# EAGLE board Qwiic GPS - Ublox SAM-M8Q-Panel (EAGLE 9.3.0)
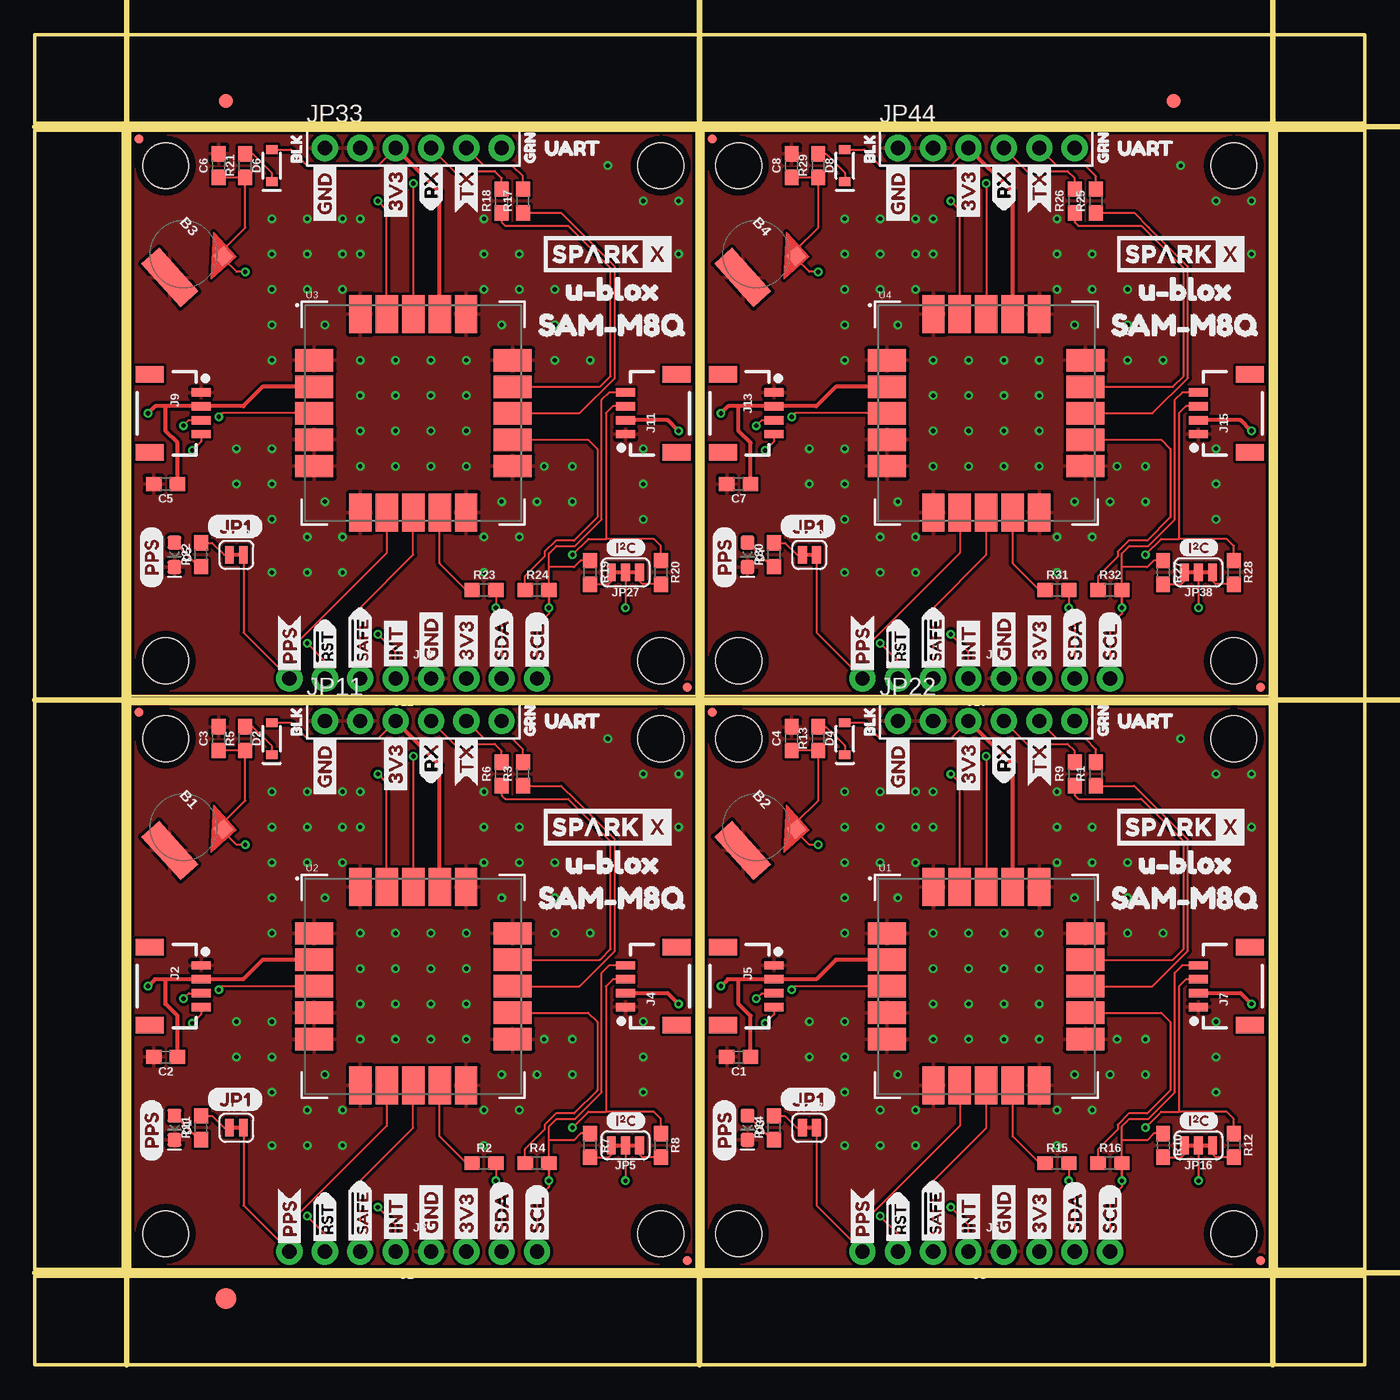
[diagram p0: board, top side]
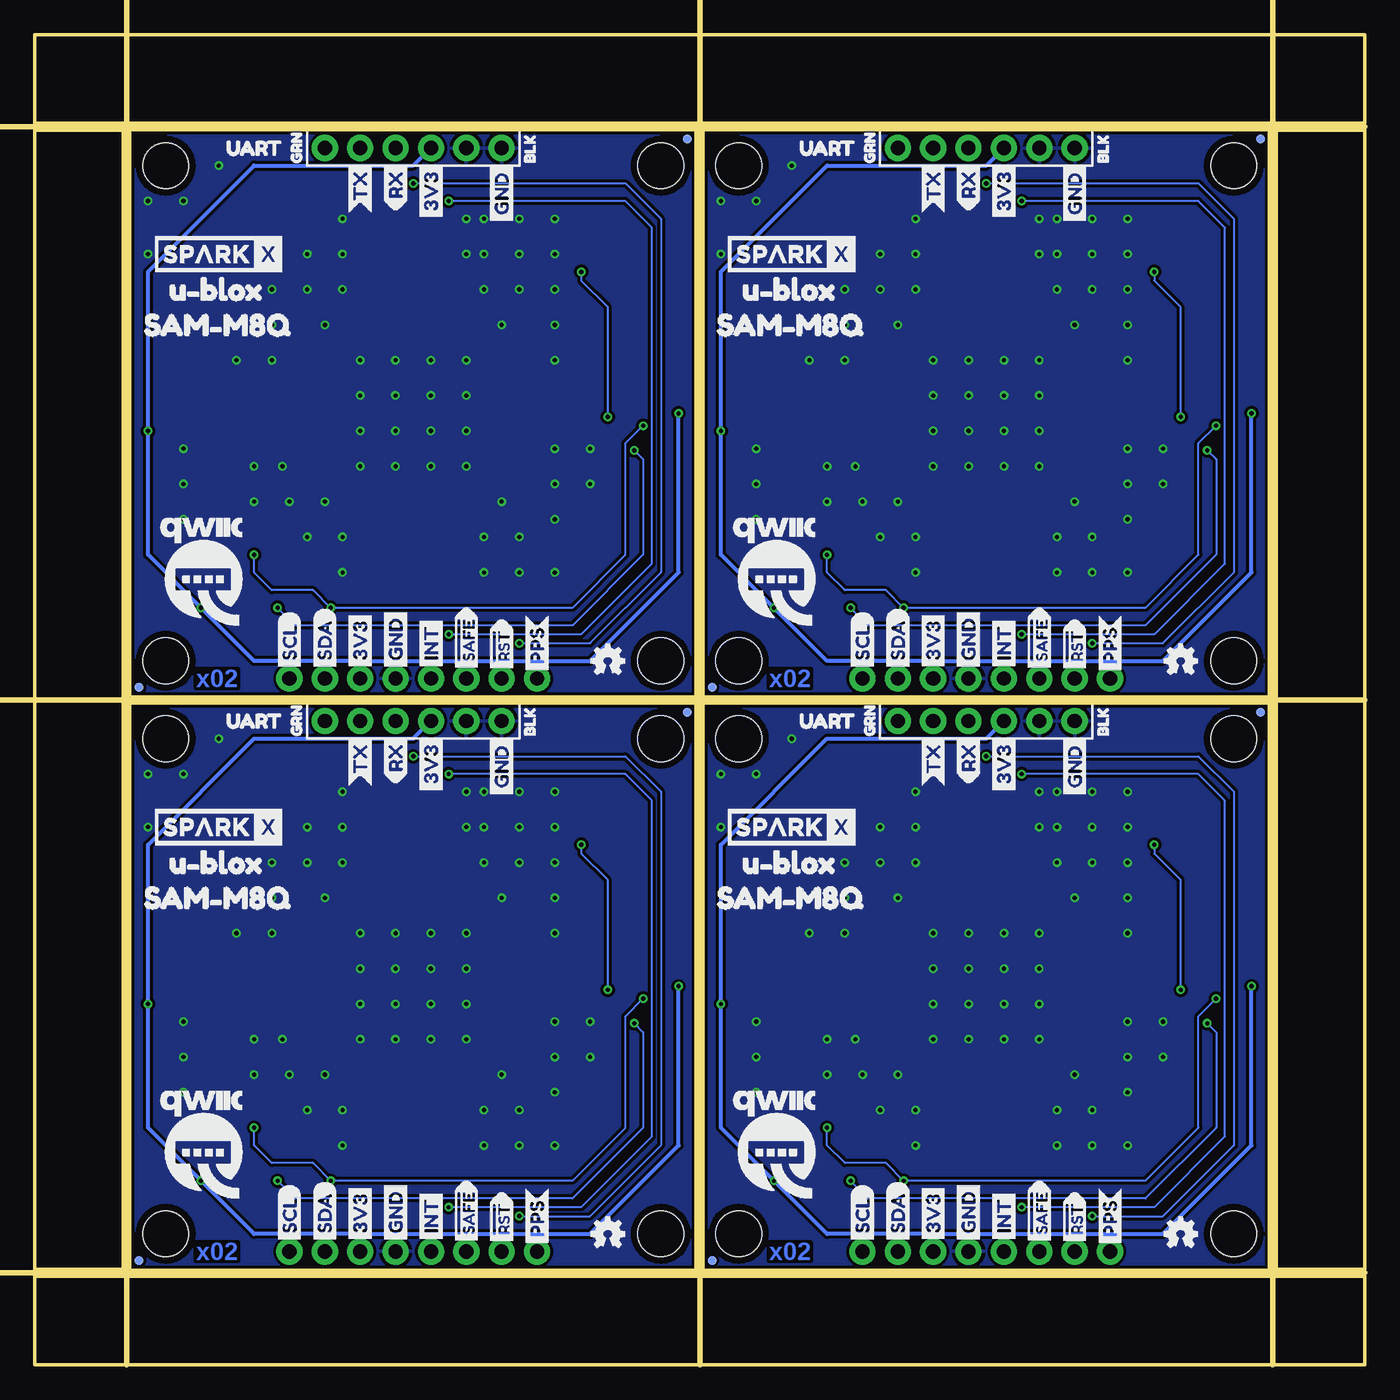
[diagram p1: board, bottom side, seen from below]

Size 95.5 x 95.5 mm. Coordinates in mm from the lower left corner, seen from the top.
Outline: 6.86,6.86 6.86,47.5 47.5,47.5 47.5,6.86 6.86,6.86
Outline: 48.01,6.86 48.01,47.5 88.65,47.5 88.65,6.86 48.01,6.86
Outline: 6.86,48.01 6.86,88.65 47.5,88.65 47.5,48.01 6.86,48.01
Outline: 48.01,48.01 48.01,88.65 88.65,88.65 88.65,48.01 48.01,48.01
Outline: 0,6.35 95.5,6.35 95.5,0 0,0 0,6.35
Outline: 89.15,88.65 95.5,88.65 95.5,6.86 89.15,6.86 89.15,88.65
Outline: 0,95.5 95.5,95.5 95.5,89.15 0,89.15 0,95.5
Outline: 0,88.65 6.35,88.65 6.35,6.86 0,6.86 0,88.65
Copper layers (1*16): Top 0.035mm / dielectric 1.5mm / Bottom 0.035mm
Design rules "SparkFun-2-layer-PCBWay-LIMIT": minimum track width 6mil, minimum drill 0.3mm, track to track 6mil, track to pad 6mil, pad to pad 6mil, via to via 6mil, smd to smd 6mil, copper to edge 6mil, drill to drill 6mil, minimum pad ring 6mil, minimum via ring 6mil, stop-mask expansion 4mil, vias tented up to drill 25mil, thermal gap 10mil
Milling: 6 lines

## Footprints (pad centres in the part's own frame; a part is rotated, then mirrored left to right if it is on the bottom)
ML414H_IV01E = smd 1 x 1: + 2.022,2.032 | smd 4.2 x 1.7: - 0.6,-1.85
0603 = smd 1.1 x 1: 1 -0.85,0; 2 0.85,0
LED-0603 = smd 1 x 1: A -0.877,0; C 0.877,0
SOD-323 = smd 0.63 x 0.83: A 1.15,0; C -1.15,0
FIDUCIAL-1X2 = smd 1 x 1: 1 0,0
FIDUCIAL-1.5X3 = smd 1.5 x 1.5: 1 0,0
1X04_NO_SILK = drill 1.016 pad 1.88: 1 0,0; 2 2.54,0; 3 5.08,0; 4 7.62,0
1X04_1MM_RA = smd 0.6 x 1.35: 1 -1.5,0; 2 -0.5,0; 3 0.5,0; 4 1.5,0 | smd 1.2 x 2: NC1 2.8,-3.675; NC2 -2.8,-3.675
SMT-JUMPER_2_NC_TRACE_SILK = smd 0.635 x 1.27: 1 -0.508,0; 2 0.508,0
MICRO-FIDUCIAL = smd 0.635 x 0.635: 1 0,0
STAND-OFF = hole 3.302: 0,0
SMT-JUMPER_3_2-NC_TRACE_SILK = smd 0.635 x 1.27: 1 -1.016,0; 2 0,0; 3 1.016,0
1X06_NO_SILK = drill 1.016 pad 1.88: 1 0,0; 2 2.54,0; 3 5.08,0; 4 7.62,0; 5 10.16,0; 6 12.7,0
SAM-M8Q = smd 2.75 x 1.6: 1 -7.125,3.8; 2 -7.125,1.9; 3 -7.125,0; 4 -7.125,-1.9; 5 -7.125,-3.8; 11 7.125,-3.8; 12 7.125,-1.9; 13 7.125,0; 14 7.125,1.9; 15 7.125,3.8 | smd 1.6 x 2.75: 6 -3.8,-7.125; 7 -1.9,-7.125; 8 0,-7.125; 9 1.9,-7.125; 10 3.8,-7.125; 16 3.8,7.125; 17 1.9,7.125; 18 0,7.125; 19 -1.9,7.125; 20 -3.8,7.125

## Placement (x,y rotation side)
B1  6.8MM_COIN_CELL  [ML414H_IV01E]  10.67,38.61 312 top
B2  6.8MM_COIN_CELL  [ML414H_IV01E]  51.82,38.61 312 top
B3  6.8MM_COIN_CELL  [ML414H_IV01E]  10.67,79.76 312 top
B4  6.8MM_COIN_CELL  [ML414H_IV01E]  51.82,79.76 312 top
C1  1.0uF  [0603]  50.55,22.1 180 top
C2  1.0uF  [0603]  9.4,22.1 180 top
C3  1.0uF  [0603]  13.21,44.96 90 top
C4  1.0uF  [0603]  54.36,44.96 90 top
C5  1.0uF  [0603]  9.4,63.25 180 top
C6  1.0uF  [0603]  13.21,86.11 90 top
C7  1.0uF  [0603]  50.55,63.25 180 top
C8  1.0uF  [0603]  54.36,86.11 90 top
D1  Yellow  [LED-0603]  10.03,17.02 270 top
D2  0.5A/40V/420mV  [SOD-323]  17.02,44.96 90 top
D3  Yellow  [LED-0603]  51.18,17.02 270 top
D4  0.5A/40V/420mV  [SOD-323]  58.17,44.96 90 top
D5  Yellow  [LED-0603]  10.03,58.17 270 top
D6  0.5A/40V/420mV  [SOD-323]  17.02,86.11 90 top
D7  Yellow  [LED-0603]  51.18,58.17 270 top
D8  0.5A/40V/420mV  [SOD-323]  58.17,86.11 90 top
E$1  [FIDUCIAL-1X2]  13.72,90.74 0 top
E$2  [FIDUCIAL-1X2]  81.79,90.74 0 top
E$3  [FIDUCIAL-1.5X3]  13.72,4.76 0 top
J1  [1X04_NO_SILK]  25.91,8.13 180 top
J2  [1X04_1MM_RA]  11.94,27.18 270 top
J3  PTH  [1X04_NO_SILK]  28.45,8.13 0 top
J4  [1X04_1MM_RA]  42.42,27.18 90 top
J5  [1X04_1MM_RA]  53.09,27.18 270 top
J6  PTH  [1X04_NO_SILK]  69.6,8.13 0 top
J7  [1X04_1MM_RA]  83.57,27.18 90 top
J8  [1X04_NO_SILK]  67.06,8.13 180 top
J9  [1X04_1MM_RA]  11.94,68.33 270 top
J10  PTH  [1X04_NO_SILK]  28.45,49.28 0 top
J11  [1X04_1MM_RA]  42.42,68.33 90 top
J12  [1X04_NO_SILK]  25.91,49.28 180 top
J13  [1X04_1MM_RA]  53.09,68.33 270 top
J14  PTH  [1X04_NO_SILK]  69.6,49.28 0 top
J15  [1X04_1MM_RA]  83.57,68.33 90 top
J16  [1X04_NO_SILK]  67.06,49.28 180 top
JP1  [SMT-JUMPER_2_NC_TRACE_SILK]  14.48,17.02 0 top
JP2  FIDUCIALUFIDUCIAL  [MICRO-FIDUCIAL]  46.86,7.49 0 top
JP3  STAND-OFF  [STAND-OFF]  9.4,44.96 0 top
JP4  STAND-OFF  [STAND-OFF]  44.96,44.96 0 top
JP5  [SMT-JUMPER_3_2-NC_TRACE_SILK]  42.42,15.75 180 top
JP6  FIDUCIALUFIDUCIAL  [MICRO-FIDUCIAL]  7.49,46.86 0 top
JP7  FIDUCIALUFIDUCIAL  [MICRO-FIDUCIAL]  46.86,7.49 0 bottom
JP8  FIDUCIALUFIDUCIAL  [MICRO-FIDUCIAL]  7.49,46.86 0 bottom
JP9  STAND-OFF  [STAND-OFF]  9.4,9.4 0 top
JP10  STAND-OFF  [STAND-OFF]  44.96,9.4 0 top
JP11  BOOT  [1X06_NO_SILK]  20.83,46.23 0 top
JP12  STAND-OFF  [STAND-OFF]  50.55,44.96 0 top
JP13  STAND-OFF  [STAND-OFF]  86.11,44.96 0 top
JP14  FIDUCIALUFIDUCIAL  [MICRO-FIDUCIAL]  88.01,7.49 0 top
JP15  FIDUCIALUFIDUCIAL  [MICRO-FIDUCIAL]  48.64,46.86 0 top
JP16  [SMT-JUMPER_3_2-NC_TRACE_SILK]  83.57,15.75 180 top
JP17  [SMT-JUMPER_2_NC_TRACE_SILK]  55.63,17.02 0 top
JP18  FIDUCIALUFIDUCIAL  [MICRO-FIDUCIAL]  88.01,7.49 0 bottom
JP19  FIDUCIALUFIDUCIAL  [MICRO-FIDUCIAL]  48.64,46.86 0 bottom
JP20  STAND-OFF  [STAND-OFF]  50.55,9.4 0 top
JP21  STAND-OFF  [STAND-OFF]  86.11,9.4 0 top
JP22  BOOT  [1X06_NO_SILK]  61.98,46.23 0 top
JP23  STAND-OFF  [STAND-OFF]  9.4,86.11 0 top
JP24  STAND-OFF  [STAND-OFF]  44.96,86.11 0 top
JP25  FIDUCIALUFIDUCIAL  [MICRO-FIDUCIAL]  46.86,48.64 0 top
JP26  FIDUCIALUFIDUCIAL  [MICRO-FIDUCIAL]  7.49,88.01 0 top
JP27  [SMT-JUMPER_3_2-NC_TRACE_SILK]  42.42,56.9 180 top
JP28  [SMT-JUMPER_2_NC_TRACE_SILK]  14.48,58.17 0 top
JP29  FIDUCIALUFIDUCIAL  [MICRO-FIDUCIAL]  46.86,48.64 0 bottom
JP30  FIDUCIALUFIDUCIAL  [MICRO-FIDUCIAL]  7.49,88.01 0 bottom
JP31  STAND-OFF  [STAND-OFF]  9.4,50.55 0 top
JP32  STAND-OFF  [STAND-OFF]  44.96,50.55 0 top
JP33  BOOT  [1X06_NO_SILK]  20.83,87.38 0 top
JP34  STAND-OFF  [STAND-OFF]  50.55,86.11 0 top
JP35  STAND-OFF  [STAND-OFF]  86.11,86.11 0 top
JP36  FIDUCIALUFIDUCIAL  [MICRO-FIDUCIAL]  88.01,48.64 0 top
JP37  FIDUCIALUFIDUCIAL  [MICRO-FIDUCIAL]  48.64,88.01 0 top
JP38  [SMT-JUMPER_3_2-NC_TRACE_SILK]  83.57,56.9 180 top
JP39  [SMT-JUMPER_2_NC_TRACE_SILK]  55.63,58.17 0 top
JP40  FIDUCIALUFIDUCIAL  [MICRO-FIDUCIAL]  88.01,48.64 0 bottom
JP41  FIDUCIALUFIDUCIAL  [MICRO-FIDUCIAL]  48.64,88.01 0 bottom
JP42  STAND-OFF  [STAND-OFF]  50.55,50.55 0 top
JP43  STAND-OFF  [STAND-OFF]  86.11,50.55 0 top
JP44  BOOT  [1X06_NO_SILK]  61.98,87.38 0 top
LOGO1  OSHW-LOGOMINI  [OSHW-LOGO-MINI]  13.21,9.4 0 bottom
LOGO2  OSHW-LOGOMINI  [OSHW-LOGO-MINI]  54.36,9.4 0 bottom
LOGO3  OSHW-LOGOMINI  [OSHW-LOGO-MINI]  13.21,50.55 0 bottom
LOGO4  OSHW-LOGOMINI  [OSHW-LOGO-MINI]  54.36,50.55 0 bottom
R1  470  [0603]  76.2,42.42 90 top
R2  22  [0603]  32.26,14.48 0 top
R3  470  [0603]  35.05,42.42 90 top
R4  22  [0603]  36.07,14.48 0 top
R5  1k  [0603]  15.11,44.96 90 top
R6  470  [0603]  33.53,42.42 90 top
R7  2.2k  [0603]  39.88,15.75 270 top
R8  2.2k  [0603]  44.96,15.75 270 top
R9  470  [0603]  74.68,42.42 90 top
R10  2.2k  [0603]  81.03,15.75 270 top
R11  1k  [0603]  11.94,17.02 90 top
R12  2.2k  [0603]  86.11,15.75 270 top
R13  1k  [0603]  56.26,44.96 90 top
R14  1k  [0603]  53.09,17.02 90 top
R15  22  [0603]  73.41,14.48 0 top
R16  22  [0603]  77.22,14.48 0 top
R17  470  [0603]  35.05,83.57 90 top
R18  470  [0603]  33.53,83.57 90 top
R19  2.2k  [0603]  39.88,56.9 270 top
R20  2.2k  [0603]  44.96,56.9 270 top
R21  1k  [0603]  15.11,86.11 90 top
R22  1k  [0603]  11.94,58.17 90 top
R23  22  [0603]  32.26,55.63 0 top
R24  22  [0603]  36.07,55.63 0 top
R25  470  [0603]  76.2,83.57 90 top
R26  470  [0603]  74.68,83.57 90 top
R27  2.2k  [0603]  81.03,56.9 270 top
R28  2.2k  [0603]  86.11,56.9 270 top
R29  1k  [0603]  56.26,86.11 90 top
R30  1k  [0603]  53.09,58.17 90 top
R31  22  [0603]  73.41,55.63 0 top
R32  22  [0603]  77.22,55.63 0 top
U1  SAM-M8Q  [SAM-M8Q]  68.33,27.18 0 top
U2  SAM-M8Q  [SAM-M8Q]  27.18,27.18 0 top
U3  SAM-M8Q  [SAM-M8Q]  27.18,68.33 0 top
U4  SAM-M8Q  [SAM-M8Q]  68.33,68.33 0 top
U$1  [SDA-[)]  33.53,8.51 90 top
U$2  SPARKX-LOGO4  [SPARKX-MEDIUM]  41.15,38.61 0 bottom
U$3  [SCL-[)]  36.07,8.51 90 top
U$4  [SDA-[)]  33.53,8.51 90 bottom
U$5  [SCL-[)]  36.07,8.51 90 bottom
U$6  [3V3-04]  30.99,8.51 90 top
U$7  [3V3-04]  30.99,8.51 90 bottom
U$8  [GND-04]  28.45,8.51 90 top
U$9  [GND-04]  28.45,8.51 90 bottom
U$10  [I_SUPER2_C-()-03]  41.02,17.53 0 top
U$11  [UART0]  41.53,46.23 0 bottom
U$12  [BLK1]  18.8,44.45 90 top
U$13  [BLK1]  18.8,44.45 90 bottom
U$14  [GRN2]  35.56,44.45 90 top
U$15  [INT8]  25.91,8.51 90 top
U$16  [INT8]  25.91,8.51 90 bottom
U$17  [GRN2]  35.56,44.45 90 bottom
U$18  [JP10]  12.32,19.05 0 top
U$19  [RX6]  28.45,41.66 90 top
U$20  [RX6]  28.45,41.66 90 bottom
U$21  [SAM#M8Q4]  34.8,33.53 0 top
U$22  [U#BLOX3]  46.1,36.07 0 bottom
U$23  [TX7]  30.99,41.53 90 top
U$24  [TX7]  30.99,41.53 90 bottom
U$25  [SAM#M8Q4]  47.88,33.53 0 bottom
U$26  [U#BLOX3]  36.7,36.07 0 top
U$27  [3V3-04]  25.91,40.77 90 top
U$28  [QWIIC-LOGO-LARGE]  42.42,15.75 0 bottom
U$29  [PPS0]  8.38,14.61 90 top
U$30  [SDA-[)]  74.68,8.51 90 top
U$31  SPARKX-LOGO4  [SPARKX-MEDIUM]  41.15,38.61 0 top
U$32  [3V3-04]  25.91,40.77 90 bottom
U$33  [GND-04]  20.83,40.51 90 top
U$34  [GND-04]  20.83,40.51 90 bottom
U$35  [#RST3]  20.83,8.25 90 top
U$36  [#RST3]  20.83,8.25 90 bottom
U$37  [SCL-[)]  77.22,8.51 90 top
U$38  [SDA-[)]  74.68,8.51 90 bottom
U$39  [#SAFE1]  23.37,8.25 90 top
U$40  [#SAFE1]  23.37,8.25 90 bottom
U$41  [SCL-[)]  77.22,8.51 90 bottom
U$42  [3V3-04]  72.14,8.51 90 top
U$43  [PPS5]  18.29,8.25 90 top
U$44  [PPS5]  18.29,8.25 90 bottom
U$45  [UART0]  35.69,46.23 0 top
U$46  [3V3-04]  72.14,8.51 90 bottom
U$47  [GND-04]  69.6,8.51 90 top
U$48  [GND-04]  69.6,8.51 90 bottom
U$49  [I_SUPER2_C-()-03]  82.17,17.53 0 top
U$50  [INT8]  67.06,8.51 90 top
U$51  [INT8]  67.06,8.51 90 bottom
U$52  [RX6]  69.6,41.66 90 top
U$53  [RX6]  69.6,41.66 90 bottom
U$54  [SAM#M8Q4]  75.95,33.53 0 top
U$55  [TX7]  72.14,41.53 90 top
U$56  [TX7]  72.14,41.53 90 bottom
U$57  [U#BLOX3]  77.85,36.07 0 top
U$58  [U#BLOX3]  87.25,36.07 0 bottom
U$59  [SAM#M8Q4]  89.03,33.53 0 bottom
U$60  [PPS0]  49.53,14.61 90 top
U$61  SPARKX-LOGO4  [SPARKX-MEDIUM]  82.3,38.61 0 top
U$62  SPARKX-LOGO4  [SPARKX-MEDIUM]  82.3,38.61 0 bottom
U$63  [3V3-04]  67.06,40.77 90 top
U$64  [3V3-04]  67.06,40.77 90 bottom
U$65  [GND-04]  61.98,40.51 90 top
U$66  [GND-04]  61.98,40.51 90 bottom
U$67  [#RST3]  61.98,8.25 90 top
U$68  [#RST3]  61.98,8.25 90 bottom
U$69  [#SAFE1]  64.52,8.25 90 top
U$70  [#SAFE1]  64.52,8.25 90 bottom
U$71  [PPS5]  59.44,8.25 90 top
U$72  [PPS5]  59.44,8.25 90 bottom
U$73  [UART0]  76.84,46.23 0 top
U$74  [UART0]  82.68,46.23 0 bottom
U$75  [BLK1]  59.94,44.45 90 top
U$76  [BLK1]  59.94,44.45 90 bottom
U$77  [GRN2]  76.71,44.45 90 top
U$78  [GRN2]  76.71,44.45 90 bottom
U$79  [JP10]  53.47,19.05 0 top
U$80  [QWIIC-LOGO-LARGE]  83.57,15.75 0 bottom
U$81  [SDA-[)]  33.53,49.66 90 top
U$82  [SCL-[)]  36.07,49.66 90 top
U$83  [SDA-[)]  33.53,49.66 90 bottom
U$84  [SCL-[)]  36.07,49.66 90 bottom
U$85  [3V3-04]  30.99,49.66 90 top
U$86  [3V3-04]  30.99,49.66 90 bottom
U$87  [GND-04]  28.45,49.66 90 top
U$88  [GND-04]  28.45,49.66 90 bottom
U$89  [I_SUPER2_C-()-03]  41.02,58.67 0 top
U$90  [INT8]  25.91,49.66 90 top
U$91  [INT8]  25.91,49.66 90 bottom
U$92  [RX6]  28.45,82.8 90 top
U$93  [RX6]  28.45,82.8 90 bottom
U$94  [SAM#M8Q4]  34.8,74.68 0 top
U$95  [TX7]  30.99,82.68 90 top
U$96  [TX7]  30.99,82.68 90 bottom
U$97  [U#BLOX3]  36.7,77.22 0 top
U$98  [U#BLOX3]  46.1,77.22 0 bottom
U$99  [SAM#M8Q4]  47.88,74.68 0 bottom
U$100  [PPS0]  8.38,55.75 90 top
U$101  SPARKX-LOGO4  [SPARKX-MEDIUM]  41.15,79.76 0 top
U$102  SPARKX-LOGO4  [SPARKX-MEDIUM]  41.15,79.76 0 bottom
U$103  [3V3-04]  25.91,81.92 90 top
U$104  [3V3-04]  25.91,81.92 90 bottom
U$105  [GND-04]  20.83,81.66 90 top
U$106  [GND-04]  20.83,81.66 90 bottom
U$107  [#RST3]  20.83,49.4 90 top
U$108  [#RST3]  20.83,49.4 90 bottom
U$109  [#SAFE1]  23.37,49.4 90 top
U$110  [#SAFE1]  23.37,49.4 90 bottom
U$111  [PPS5]  18.29,49.4 90 top
U$112  [PPS5]  18.29,49.4 90 bottom
U$113  [UART0]  35.69,87.38 0 top
U$114  [UART0]  41.53,87.38 0 bottom
U$115  [BLK1]  18.8,85.6 90 top
U$116  [BLK1]  18.8,85.6 90 bottom
U$117  [GRN2]  35.56,85.6 90 top
U$118  [GRN2]  35.56,85.6 90 bottom
U$119  [JP10]  12.32,60.2 0 top
U$120  [QWIIC-LOGO-LARGE]  42.42,56.9 0 bottom
U$121  [SDA-[)]  74.68,49.66 90 top
U$122  [SCL-[)]  77.22,49.66 90 top
U$123  [SDA-[)]  74.68,49.66 90 bottom
U$124  [SCL-[)]  77.22,49.66 90 bottom
U$125  [3V3-04]  72.14,49.66 90 top
U$126  [3V3-04]  72.14,49.66 90 bottom
U$127  [GND-04]  69.6,49.66 90 top
U$128  [GND-04]  69.6,49.66 90 bottom
U$129  [I_SUPER2_C-()-03]  82.17,58.67 0 top
U$130  [INT8]  67.06,49.66 90 top
U$131  [INT8]  67.06,49.66 90 bottom
U$132  [RX6]  69.6,82.8 90 top
U$133  [RX6]  69.6,82.8 90 bottom
U$134  [SAM#M8Q4]  75.95,74.68 0 top
U$135  [TX7]  72.14,82.68 90 top
U$136  [TX7]  72.14,82.68 90 bottom
U$137  [U#BLOX3]  77.85,77.22 0 top
U$138  [U#BLOX3]  87.25,77.22 0 bottom
U$139  [SAM#M8Q4]  89.03,74.68 0 bottom
U$140  [PPS0]  49.53,55.75 90 top
U$141  SPARKX-LOGO4  [SPARKX-MEDIUM]  82.3,79.76 0 top
U$142  SPARKX-LOGO4  [SPARKX-MEDIUM]  82.3,79.76 0 bottom
U$143  [3V3-04]  67.06,81.92 90 top
U$144  [3V3-04]  67.06,81.92 90 bottom
U$145  [GND-04]  61.98,81.66 90 top
U$146  [GND-04]  61.98,81.66 90 bottom
U$147  [#RST3]  61.98,49.4 90 top
U$148  [#RST3]  61.98,49.4 90 bottom
U$149  [#SAFE1]  64.52,49.4 90 top
U$150  [#SAFE1]  64.52,49.4 90 bottom
U$151  [PPS5]  59.44,49.4 90 top
U$152  [PPS5]  59.44,49.4 90 bottom
U$153  [UART0]  76.84,87.38 0 top
U$154  [UART0]  82.68,87.38 0 bottom
U$155  [BLK1]  59.94,85.6 90 top
U$156  [BLK1]  59.94,85.6 90 bottom
U$157  [GRN2]  76.71,85.6 90 top
U$158  [GRN2]  76.71,85.6 90 bottom
U$159  [JP10]  53.47,60.2 0 top
U$160  [QWIIC-LOGO-LARGE]  83.57,56.9 0 bottom

## Library data of the parts
B1-B4 = SparkFun-Batteries; PROD_ID: BATT-14267
C1-C8 = SparkFun-Capacitors; PROD_ID: CAP-00868
D1 D3 D5 D7 = SparkFun-LED; PROD_ID: DIO-09003
D2 D4 D6 D8 = SparkFun-DiscreteSemi; PROD_ID: DIO-10955
E$1 E$2 LOGO1-LOGO4 = SparkFun-Aesthetics
E$3 = SparkFun-Retired
J1 J8 J12 J16 = SparkFun-Connectors; PROD_ID: CONN-09696
J2 J4 J5 J7 J9 J11 J13 J15 = SparkFun-Connectors; PROD_ID: CONN-13694; VALUE: Qwiic Right Angle
J3 J6 J10 J14 U$2 U$31 U$61 U$62 U$101 U$102 U$141 U$142 = SparkX
JP1 JP5 JP16 JP17 JP27 JP28 JP38 JP39 = SparkFun-Jumpers
JP2-JP4 JP6-JP10 JP12-JP15 JP18-JP21 JP23-JP26 JP29-JP32 JP34-JP37 JP40-JP43 = SparkFun
JP11 JP22 JP33 JP44 = SparkFun-Connectors; PROD_ID: CONN-08437
R1 R3 R6 R9 R17 R18 R25 R26 = SparkFun-Resistors; PROD_ID: RES-07869
R2 R4 R15 R16 R23 R24 R31 R32 = SparkFun-Resistors; PROD_ID: RES-08698
R5 R11 R13 R14 R21 R22 R29 R30 = SparkFun-Resistors; PROD_ID: RES-07856
R7 R8 R10 R12 R19 R20 R27 R28 = SparkFun-Resistors; PROD_ID: RES-08272
U1-U4 = SAM-M8Q
U$1 U$3-U$10 U$27 U$28 U$30 U$32-U$34 U$37 U$38 U$41 U$42 U$46-U$49 U$63-U$66 U$80-U$89 U$103-U$106 U$120-U$129 U$143-U$146 U$160 = Labels
U$11 U$35 U$36 U$39 U$40 U$43-U$45 U$67-U$74 U$107-U$114 U$147-U$154 = buzzard_labels (7)
U$12-U$14 U$17 U$18 U$75-U$79 U$115-U$119 U$155-U$159 = buzzard_labels (8)
U$15 U$16 U$19-U$26 U$50-U$59 U$90-U$99 U$130-U$139 = buzzard_labels (5)
U$29 U$60 U$100 U$140 = buzzard_labels (6)

## Nets
3.3V: C2.1 D2.A J2.2 J3.2 J4.2 JP5.2 JP11.3 U2.2 U2.17
3.3V1: C1.1 D4.A J5.2 J6.2 J7.2 JP16.2 JP22.3 U1.2 U1.17
3.3V2: C5.1 D6.A J9.2 J10.2 J11.2 JP27.2 JP33.3 U3.2 U3.17
3.3V3: C7.1 D8.A J13.2 J14.2 J15.2 JP38.2 JP44.3 U4.2 U4.17
!RESET: J1.3 U2.18
!RESET1: J8.3 U1.18
!RESET2: J12.3 U3.18
!RESET3: J16.3 U4.18
!SAFE: J1.2 U2.8
!SAFE1: J8.2 U1.8
!SAFE2: J12.2 U3.8
!SAFE3: J16.2 U4.8
BACKUP: B1.+ C3.1 R5.1 U2.3
BACKUP1: B2.+ C4.1 R13.1 U1.3
BACKUP2: B3.+ C6.1 R21.1 U3.3
BACKUP3: B4.+ C8.1 R29.1 U4.3
GND: B1.- C2.2 C3.2 D1.C J2.1 J3.1 J4.1 JP11.1 JP11.2 U2.1 U2.4 U2.5 U2.6 U2.10 U2.11 U2.15 U2.16 U2.20
GND1: B2.- C1.2 C4.2 D3.C J5.1 J6.1 J7.1 JP22.1 JP22.2 U1.1 U1.4 U1.5 U1.6 U1.10 U1.11 U1.15 U1.16 U1.20
GND2: B3.- C5.2 C6.2 D5.C J9.1 J10.1 J11.1 JP33.1 JP33.2 U3.1 U3.4 U3.5 U3.6 U3.10 U3.11 U3.15 U3.16 U3.20
GND3: B4.- C7.2 C8.2 D7.C J13.1 J14.1 J15.1 JP44.1 JP44.2 U4.1 U4.4 U4.5 U4.6 U4.10 U4.11 U4.15 U4.16 U4.20
INT: J1.1 U2.19
INT1: J8.1 U1.19
INT2: J12.1 U3.19
INT3: J16.1 U4.19
N$1: JP16.1 R12.2
N$2: D1.A R11.1
N$3: JP16.3 R10.2
N$4: JP1.1 R11.2
N$5: JP5.1 R8.2
N$6: D2.C R5.2
N$7: D3.A R14.1
N$8: JP5.3 R7.2
N$9: JP17.1 R14.2
N$10: D4.C R13.2
N$11: JP27.1 R20.2
N$12: JP27.3 R19.2
N$13: D5.A R22.1
N$14: JP28.1 R22.2
N$15: D6.C R21.2
N$16: JP38.1 R28.2
N$17: JP38.3 R27.2
N$18: D7.A R30.1
N$19: JP39.1 R30.2
N$20: D8.C R29.2
PPS: J1.4 JP1.2 U2.7
PPS1: J8.4 JP17.2 U1.7
PPS2: J12.4 JP28.2 U3.7
PPS3: J16.4 JP39.2 U4.7
RXI: JP11.4 R6.2
RXI1: JP22.4 R9.2
RXI2: JP33.4 R18.2
RXI3: JP44.4 R26.2
RXLV: R6.1 U2.14
RXLV1: R9.1 U1.14
RXLV2: R18.1 U3.14
RXLV3: R26.1 U4.14
SCL: J2.4 J3.4 J4.4 R4.2 R7.1
SCL1: J5.4 J6.4 J7.4 R10.1 R16.2
SCL2: J9.4 J10.4 J11.4 R19.1 R24.2
SCL3: J13.4 J14.4 J15.4 R27.1 R32.2
SCL_LV: R4.1 U2.12
SCL_LV1: R16.1 U1.12
SCL_LV2: R24.1 U3.12
SCL_LV3: R32.1 U4.12
SDA: J2.3 J3.3 J4.3 R2.2 R8.1
SDA1: J5.3 J6.3 J7.3 R12.1 R15.2
SDA2: J9.3 J10.3 J11.3 R20.1 R23.2
SDA3: J13.3 J14.3 J15.3 R28.1 R31.2
SDA_LV: R2.1 U2.9
SDA_LV1: R15.1 U1.9
SDA_LV2: R23.1 U3.9
SDA_LV3: R31.1 U4.9
TXLV: R3.1 U2.13
TXLV1: R1.1 U1.13
TXLV2: R17.1 U3.13
TXLV3: R25.1 U4.13
TXO: JP11.5 R3.2
TXO1: JP22.5 R1.2
TXO2: JP33.5 R17.2
TXO3: JP44.5 R25.2

## Tracks (layer width: path | path; a pad name or v marks a point on that pad's centre or on a via)
3.3V  (via drill 0.3)
  Top 0.152: D2.A 18.41,46.11 19.56,44.96 24.64,44.96 JP11.3 | JP5.2 v42.42,13.21
  Top 0.305: U2.2 16.38,29.08 14.98,27.68 J2.2 9.4,27.68 | v46.23,25.91 45.46,26.68 J4.2 | U2.17 29.08,43.06 JP11.3 | v8.13,27.18 8.63,27.68 9.4,27.68 | C2.1 10.25,25.06 9.4,25.91 9.4,27.68
  Bottom 0.305: JP11.3 27.18,44.96 38.61,44.96 46.23,37.34 v46.23,25.91 46.23,17.02 v42.42,13.21 38.61,9.4 30.99,9.4 | 30.99,9.4 14.48,9.4 8.13,15.75 v8.13,27.18 | J3.2 30.99,9.4
3.3V1  (via drill 0.3)
  Top 0.152: D4.A 59.56,46.11 60.71,44.96 65.79,44.96 JP22.3 | JP16.2 v83.57,13.21
  Top 0.305: U1.2 57.53,29.08 56.13,27.68 J5.2 50.55,27.68 | v87.38,25.91 86.61,26.68 J7.2 | U1.17 70.23,43.06 JP22.3 | v49.28,27.18 49.78,27.68 50.55,27.68 | C1.1 51.4,25.06 50.55,25.91 50.55,27.68
  Bottom 0.305: JP22.3 68.33,44.96 79.76,44.96 87.38,37.34 v87.38,25.91 87.38,17.02 v83.57,13.21 79.76,9.4 72.14,9.4 | 72.14,9.4 55.63,9.4 49.28,15.75 v49.28,27.18 | J6.2 72.14,9.4
3.3V2  (via drill 0.3)
  Top 0.152: D6.A 18.41,87.26 19.56,86.11 24.64,86.11 JP33.3 | JP27.2 v42.42,54.36
  Top 0.305: U3.2 16.38,70.23 14.98,68.83 J9.2 9.4,68.83 | v46.23,67.06 45.46,67.83 J11.2 | U3.17 29.08,84.21 JP33.3 | v8.13,68.33 8.63,68.83 9.4,68.83 | C5.1 10.25,66.21 9.4,67.06 9.4,68.83
  Bottom 0.305: JP33.3 27.18,86.11 38.61,86.11 46.23,78.49 v46.23,67.06 46.23,58.17 v42.42,54.36 38.61,50.55 30.99,50.55 | 30.99,50.55 14.48,50.55 8.13,56.9 v8.13,68.33 | J10.2 30.99,50.55
3.3V3  (via drill 0.3)
  Top 0.152: D8.A 59.56,87.26 60.71,86.11 65.79,86.11 JP44.3 | JP38.2 v83.57,54.36
  Top 0.305: U4.2 57.53,70.23 56.13,68.83 J13.2 50.55,68.83 | v87.38,67.06 86.61,67.83 J15.2 | U4.17 70.23,84.21 JP44.3 | v49.28,68.33 49.78,68.83 50.55,68.83 | C7.1 51.4,66.21 50.55,67.06 50.55,68.83
  Bottom 0.305: JP44.3 68.33,86.11 79.76,86.11 87.38,78.49 v87.38,67.06 87.38,58.17 v83.57,54.36 79.76,50.55 72.14,50.55 | 72.14,50.55 55.63,50.55 49.28,56.9 v49.28,68.33 | J14.2 72.14,50.55
!RESET  (via drill 0.3)
  Top 0.152: v27.18,43.69 U2.18 | J1.3 20.83,9.4 v19.56,10.67
  Bottom 0.152: v19.56,10.67 14.48,10.67 9.4,15.75 9.4,41.15 11.94,43.69 v27.18,43.69
!RESET1  (via drill 0.3)
  Top 0.152: v68.33,43.69 U1.18 | J8.3 61.98,9.4 v60.71,10.67
  Bottom 0.152: v60.71,10.67 55.63,10.67 50.55,15.75 50.55,41.15 53.09,43.69 v68.33,43.69
!RESET2  (via drill 0.3)
  Top 0.152: v27.18,84.84 U3.18 | J12.3 20.83,50.55 v19.56,51.82
  Bottom 0.152: v19.56,51.82 14.48,51.82 9.4,56.9 9.4,82.3 11.94,84.84 v27.18,84.84
!RESET3  (via drill 0.3)
  Top 0.152: v68.33,84.84 U4.18 | J16.3 61.98,50.55 v60.71,51.82
  Bottom 0.152: v60.71,51.82 55.63,51.82 50.55,56.9 50.55,82.3 53.09,84.84 v68.33,84.84
!SAFE
  Top 0.152: J1.2 23.37,13.21 27.18,17.02 U2.8
!SAFE1
  Top 0.152: J8.2 64.52,13.21 68.33,17.02 U1.8
!SAFE2
  Top 0.152: J12.2 23.37,54.36 27.18,58.17 U3.8
!SAFE3
  Top 0.152: J16.2 64.52,54.36 68.33,58.17 U4.8
BACKUP  (via drill 0.3)
  Top 0.152: C3.1 R5.1 15.11,40.51 13.53,38.93 | U2.3 13.46,27.18 v13.21,26.92 | v15.11,37.34 14.48,37.34 13.53,38.28
  Top 0.254: 13.53,38.28 B1.+ 13.53,38.93
  Bottom 0.152: v13.21,26.92 13.21,34.8 15.11,36.7 v15.11,37.34
BACKUP1  (via drill 0.3)
  Top 0.152: C4.1 R13.1 56.26,40.51 54.68,38.93 | U1.3 54.61,27.18 v54.36,26.92 | v56.26,37.34 55.63,37.34 54.68,38.28
  Top 0.254: 54.68,38.28 B2.+ 54.68,38.93
  Bottom 0.152: v54.36,26.92 54.36,34.8 56.26,36.7 v56.26,37.34
BACKUP2  (via drill 0.3)
  Top 0.152: C6.1 R21.1 15.11,81.66 13.53,80.08 | U3.3 13.46,68.33 v13.21,68.07 | v15.11,78.49 14.48,78.49 13.53,79.43
  Top 0.254: 13.53,79.43 B3.+ 13.53,80.08
  Bottom 0.152: v13.21,68.07 13.21,75.95 15.11,77.85 v15.11,78.49
BACKUP3  (via drill 0.3)
  Top 0.152: C8.1 R29.1 56.26,81.66 54.68,80.08 | U4.3 54.61,68.33 v54.36,68.07 | v56.26,78.49 55.63,78.49 54.68,79.43
  Top 0.254: 54.68,79.43 B4.+ 54.68,80.08
  Bottom 0.152: v54.36,68.07 54.36,75.95 56.26,77.85 v56.26,78.49
GND  (via drill 0.3)
  other vias: 23.37,30.99 25.91,30.99 28.45,30.99 30.99,30.99 23.37,25.91 25.91,25.91 28.45,25.91 30.99,25.91 23.37,28.45 25.91,28.45 28.45,28.45 30.99,28.45 17.02,24.64 17.02,22.1 17.02,19.56 19.56,18.29 20.83,20.83 33.53,20.83 33.53,33.53 20.83,33.53 17.02,30.99 17.02,33.53 17.02,36.07 19.56,36.07 34.8,36.07 37.34,36.07 37.34,33.53 37.34,30.99 34.8,18.29 32.26,18.29 22.1,18.29 22.1,36.07 32.26,36.07 41.15,44.96 43.69,42.42 46.23,42.42 46.23,38.61 43.69,19.56 43.69,22.1 23.37,23.37 25.91,23.37 28.45,23.37 30.99,23.37 23.37,38.61 19.56,38.61 17.02,38.61 32.26,38.61 34.8,38.61 32.26,41.15 36.07,20.83 38.61,20.83 38.61,23.37 36.58,23.37 43.69,24.64 39.88,30.99 23.37,41.15 19.56,41.15 17.02,41.15 22.1,38.61 22.1,41.15 22.1,15.75 19.56,15.75 17.02,15.75 14.48,24.64 14.48,22.1 32.26,15.75
  pour Top (isolate 0.203): 6.86,47.5 47.5,47.5 47.5,6.86 6.86,6.86
  pour Bottom (isolate 0.203): 6.86,47.5 47.5,47.5 47.5,6.86 6.86,6.86
GND1  (via drill 0.3)
  other vias: 64.52,30.99 67.06,30.99 69.6,30.99 72.14,30.99 64.52,25.91 67.06,25.91 69.6,25.91 72.14,25.91 64.52,28.45 67.06,28.45 69.6,28.45 72.14,28.45 58.17,24.64 58.17,22.1 58.17,19.56 60.71,18.29 61.98,20.83 74.68,20.83 74.68,33.53 61.98,33.53 58.17,30.99 58.17,33.53 58.17,36.07 60.71,36.07 75.95,36.07 78.49,36.07 78.49,33.53 78.49,30.99 75.95,18.29 73.41,18.29 63.25,18.29 63.25,36.07 73.41,36.07 82.3,44.96 84.84,42.42 87.38,42.42 87.38,38.61 84.84,19.56 84.84,22.1 64.52,23.37 67.06,23.37 69.6,23.37 72.14,23.37 64.52,38.61 60.71,38.61 58.17,38.61 73.41,38.61 75.95,38.61 73.41,41.15 77.22,20.83 79.76,20.83 79.76,23.37 77.72,23.37 84.84,24.64 81.03,30.99 64.52,41.15 60.71,41.15 58.17,41.15 63.25,38.61 63.25,41.15 63.25,15.75 60.71,15.75 58.17,15.75 55.63,24.64 55.63,22.1 73.41,15.75
  pour Top (isolate 0.203): 48.01,47.5 88.65,47.5 88.65,6.86 48.01,6.86
  pour Bottom (isolate 0.203): 48.01,47.5 88.65,47.5 88.65,6.86 48.01,6.86
GND2  (via drill 0.3)
  other vias: 23.37,72.14 25.91,72.14 28.45,72.14 30.99,72.14 23.37,67.06 25.91,67.06 28.45,67.06 30.99,67.06 23.37,69.6 25.91,69.6 28.45,69.6 30.99,69.6 17.02,65.79 17.02,63.25 17.02,60.71 19.56,59.44 20.83,61.98 33.53,61.98 33.53,74.68 20.83,74.68 17.02,72.14 17.02,74.68 17.02,77.22 19.56,77.22 34.8,77.22 37.34,77.22 37.34,74.68 37.34,72.14 34.8,59.44 32.26,59.44 22.1,59.44 22.1,77.22 32.26,77.22 41.15,86.11 43.69,83.57 46.23,83.57 46.23,79.76 43.69,60.71 43.69,63.25 23.37,64.52 25.91,64.52 28.45,64.52 30.99,64.52 23.37,79.76 19.56,79.76 17.02,79.76 32.26,79.76 34.8,79.76 32.26,82.3 36.07,61.98 38.61,61.98 38.61,64.52 36.58,64.52 43.69,65.79 39.88,72.14 23.37,82.3 19.56,82.3 17.02,82.3 22.1,79.76 22.1,82.3 22.1,56.9 19.56,56.9 17.02,56.9 14.48,65.79 14.48,63.25 32.26,56.9
  pour Top (isolate 0.203): 6.86,88.65 47.5,88.65 47.5,48.01 6.86,48.01
  pour Bottom (isolate 0.203): 6.86,88.65 47.5,88.65 47.5,48.01 6.86,48.01
GND3  (via drill 0.3)
  other vias: 64.52,72.14 67.06,72.14 69.6,72.14 72.14,72.14 64.52,67.06 67.06,67.06 69.6,67.06 72.14,67.06 64.52,69.6 67.06,69.6 69.6,69.6 72.14,69.6 58.17,65.79 58.17,63.25 58.17,60.71 60.71,59.44 61.98,61.98 74.68,61.98 74.68,74.68 61.98,74.68 58.17,72.14 58.17,74.68 58.17,77.22 60.71,77.22 75.95,77.22 78.49,77.22 78.49,74.68 78.49,72.14 75.95,59.44 73.41,59.44 63.25,59.44 63.25,77.22 73.41,77.22 82.3,86.11 84.84,83.57 87.38,83.57 87.38,79.76 84.84,60.71 84.84,63.25 64.52,64.52 67.06,64.52 69.6,64.52 72.14,64.52 64.52,79.76 60.71,79.76 58.17,79.76 73.41,79.76 75.95,79.76 73.41,82.3 77.22,61.98 79.76,61.98 79.76,64.52 77.72,64.52 84.84,65.79 81.03,72.14 64.52,82.3 60.71,82.3 58.17,82.3 63.25,79.76 63.25,82.3 63.25,56.9 60.71,56.9 58.17,56.9 55.63,65.79 55.63,63.25 73.41,56.9
  pour Top (isolate 0.203): 48.01,88.65 88.65,88.65 88.65,48.01 48.01,48.01
  pour Bottom (isolate 0.203): 48.01,88.65 88.65,88.65 88.65,48.01 48.01,48.01
INT  (via drill 0.3)
  Top 0.152: v24.64,42.42 25.28,41.78 U2.19 | J1.1 25.91,10.03 v24.64,11.3
  Bottom 0.152: v24.64,11.3 15.11,11.3 10.03,16.38 10.03,40.51 11.94,42.42 v24.64,42.42
INT1  (via drill 0.3)
  Top 0.152: v65.79,42.42 66.43,41.78 U1.19 | J8.1 67.06,10.03 v65.79,11.3
  Bottom 0.152: v65.79,11.3 56.26,11.3 51.18,16.38 51.18,40.51 53.09,42.42 v65.79,42.42
INT2  (via drill 0.3)
  Top 0.152: v24.64,83.57 25.28,82.93 U3.19 | J12.1 25.91,51.18 v24.64,52.45
  Bottom 0.152: v24.64,52.45 15.11,52.45 10.03,57.53 10.03,81.66 11.94,83.57 v24.64,83.57
INT3  (via drill 0.3)
  Top 0.152: v65.79,83.57 66.43,82.93 U4.19 | J16.1 67.06,51.18 v65.79,52.45
  Bottom 0.152: v65.79,52.45 56.26,52.45 51.18,57.53 51.18,81.66 53.09,83.57 v65.79,83.57
N$1
  Top 0.152: R12.2 84.8,14.9 84.58,15.11 JP16.1
N$2
  Top 0.152: R11.1 11.76,16.17 D1.A
N$3
  Top 0.152: R10.2 82.34,14.9 82.55,15.11 JP16.3
N$4
  Top 0.152: JP1.1 13.59,17.02 12.74,17.87 R11.2
N$5
  Top 0.152: R8.2 43.65,14.9 43.43,15.11 JP5.1
N$6
  Top 0.152: R5.2 15.66,45.81 17.02,44.45 D2.C
N$7
  Top 0.152: R14.1 52.91,16.17 D3.A
N$8
  Top 0.152: R7.2 41.19,14.9 41.4,15.11 JP5.3
N$9
  Top 0.152: JP17.1 54.74,17.02 53.89,17.87 R14.2
N$10
  Top 0.152: R13.2 56.81,45.81 58.17,44.45 D4.C
N$11
  Top 0.152: R20.2 43.65,56.05 43.43,56.26 JP27.1
N$12
  Top 0.152: R19.2 41.19,56.05 41.4,56.26 JP27.3
N$13
  Top 0.152: R22.1 11.76,57.32 D5.A
N$14
  Top 0.152: JP28.1 13.59,58.17 12.74,59.02 R22.2
N$15
  Top 0.152: R21.2 15.66,86.96 17.02,85.6 D6.C
N$16
  Top 0.152: R28.2 84.8,56.05 84.58,56.26 JP38.1
N$17
  Top 0.152: R27.2 82.34,56.05 82.55,56.26 JP38.3
N$18
  Top 0.152: R30.1 52.91,57.32 D7.A
N$19
  Top 0.152: JP39.1 54.74,58.17 53.89,59.02 R30.2
N$20
  Top 0.152: R29.2 56.81,86.96 58.17,85.6 D8.C
PPS
  Top 0.152: JP1.2 14.99,11.43 J1.4 19.02,8.87 19.02,10.89 25.28,17.14 U2.7
PPS1
  Top 0.152: JP17.2 56.13,11.43 J8.4 60.17,8.87 60.17,10.89 66.43,17.14 U1.7
PPS2
  Top 0.152: JP28.2 14.99,52.58 J12.4 19.02,50.01 19.02,52.04 25.28,58.29 U3.7
PPS3
  Top 0.152: JP39.2 56.13,52.58 J16.4 60.17,50.01 60.17,52.04 66.43,58.29 U4.7
RXI
  Top 0.152: JP11.4 30.1,44.58 33.02,44.58 33.53,44.07 R6.2
RXI1
  Top 0.152: JP22.4 71.25,44.58 74.17,44.58 74.68,44.07 R9.2
RXI2
  Top 0.152: JP33.4 30.1,85.73 33.02,85.73 33.53,85.22 R18.2
RXI3
  Top 0.152: JP44.4 71.25,85.73 74.17,85.73 74.68,85.22 R26.2
RXLV
  Top 0.152: U2.14 40.58,29.08 41.35,29.84 41.35,37.59 38.3,40.64 33.78,40.64 33.53,40.89 R6.1
RXLV1
  Top 0.152: U1.14 81.73,29.08 82.5,29.84 82.5,37.59 79.45,40.64 74.93,40.64 74.68,40.89 R9.1
RXLV2
  Top 0.152: U3.14 40.58,70.23 41.35,70.99 41.35,78.74 38.3,81.79 33.78,81.79 33.53,82.04 R18.1
RXLV3
  Top 0.152: U4.14 81.73,70.23 82.5,70.99 82.5,78.74 79.45,81.79 74.93,81.79 74.68,82.04 R26.1
SCL  (via drill 0.3)
  Top 0.152: J3.4 36.07,11.94 36.92,12.79 R4.2 | v36.92,13.21 R4.2 | J2.4 11.94,25.15 v11.3,24.51 | J4.4 41.25,28.68 40.72,28.14 40.72,19.56 38.81,17.65 37.46,17.65 36.92,17.11 36.92,16.13 | R4.2 36.92,16.13 | R7.1 39.2,16.6 38.73,16.13 36.92,16.13
  Bottom 0.152: v11.3,24.51 10.67,23.88 10.67,17.02 15.75,11.94 35.65,11.94 v36.92,13.21
SCL1  (via drill 0.3)
  Top 0.152: J6.4 77.22,11.94 78.07,12.79 R16.2 | v78.07,13.21 R16.2 | J5.4 53.09,25.15 v52.45,24.51 | J7.4 82.4,28.68 81.86,28.14 81.86,19.56 79.96,17.65 78.61,17.65 78.07,17.11 78.07,16.13 | R16.2 78.07,16.13 | R10.1 80.35,16.6 79.88,16.13 78.07,16.13
  Bottom 0.152: v52.45,24.51 51.82,23.88 51.82,17.02 56.9,11.94 76.8,11.94 v78.07,13.21
SCL2  (via drill 0.3)
  Top 0.152: J10.4 36.07,53.09 36.92,53.94 R24.2 | v36.92,54.36 R24.2 | J9.4 11.94,66.29 v11.3,65.66 | J11.4 41.25,69.83 40.72,69.29 40.72,60.7 38.81,58.8 37.46,58.8 36.92,58.25 36.92,57.28 | R24.2 36.92,57.28 | R19.1 39.2,57.75 38.73,57.28 36.92,57.28
  Bottom 0.152: v11.3,65.66 10.67,65.02 10.67,58.17 15.75,53.09 35.65,53.09 v36.92,54.36
SCL3  (via drill 0.3)
  Top 0.152: J14.4 77.22,53.09 78.07,53.94 R32.2 | v78.07,54.36 R32.2 | J13.4 53.09,66.29 v52.45,65.66 | J15.4 82.4,69.83 81.86,69.29 81.86,60.7 79.96,58.8 78.61,58.8 78.07,58.25 78.07,57.28 | R32.2 78.07,57.28 | R27.1 80.35,57.75 79.88,57.28 78.07,57.28
  Bottom 0.152: v52.45,65.66 51.82,65.02 51.82,58.17 56.9,53.09 76.8,53.09 v78.07,54.36
SCL_LV
  Top 0.152: R4.1 35.22,15.49 36.61,16.89 36.61,17.23 37.41,18.03 38.73,18.03 40.41,19.71 40.41,24.61 39.75,25.28 U2.12
SCL_LV1
  Top 0.152: R16.1 76.37,15.49 77.76,16.89 77.76,17.23 78.56,18.03 79.88,18.03 81.56,19.71 81.56,24.61 80.89,25.28 U1.12
SCL_LV2
  Top 0.152: R24.1 35.22,56.64 36.61,58.04 36.61,58.38 37.41,59.18 38.73,59.18 40.41,60.86 40.41,65.76 39.75,66.43 U3.12
SCL_LV3
  Top 0.152: R32.1 76.37,56.64 77.76,58.04 77.76,58.38 78.56,59.18 79.88,59.18 81.56,60.86 81.56,65.76 80.89,66.43 U4.12
SDA  (via drill 0.3)
  Top 0.152: J3.3 33.53,11.94 33.11,12.36 v33.11,13.21 R2.2 33.53,14.48 | R8.1 44.96,17.65 44.45,18.16 41.02,18.16 | v10.67,26.29 11.06,26.68 J2.3 | J4.3 41.52,27.68 41.02,27.18 41.02,18.16 | v38.61,17.02 39.75,18.16 41.02,18.16
  Bottom 0.152: v10.67,26.29 11.94,25.02 11.94,17.02 15.75,13.21 v33.11,13.21 34.38,14.48 37.34,14.48 38.61,15.75 v38.61,17.02
SDA1  (via drill 0.3)
  Top 0.152: J6.3 74.68,11.94 74.26,12.36 v74.26,13.21 R15.2 74.68,14.48 | R12.1 86.11,17.65 85.6,18.16 82.17,18.16 | v51.82,26.29 52.2,26.68 J5.3 | J7.3 82.67,27.68 82.17,27.18 82.17,18.16 | v79.76,17.02 80.9,18.16 82.17,18.16
  Bottom 0.152: v51.82,26.29 53.09,25.02 53.09,17.02 56.9,13.21 v74.26,13.21 75.53,14.48 78.49,14.48 79.76,15.75 v79.76,17.02
SDA2  (via drill 0.3)
  Top 0.152: J10.3 33.53,53.09 33.11,53.51 v33.11,54.36 R23.2 33.53,55.63 | R20.1 44.96,58.8 44.45,59.31 41.02,59.31 | v10.67,67.44 11.06,67.83 J9.3 | J11.3 41.52,68.83 41.02,68.33 41.02,59.31 | v38.61,58.17 39.75,59.31 41.02,59.31
  Bottom 0.152: v10.67,67.44 11.94,66.17 11.94,58.17 15.75,54.36 v33.11,54.36 34.38,55.63 37.34,55.63 38.61,56.9 v38.61,58.17
SDA3  (via drill 0.3)
  Top 0.152: J14.3 74.68,53.09 74.26,53.51 v74.26,54.36 R31.2 74.68,55.63 | R28.1 86.11,58.8 85.6,59.31 82.17,59.31 | v51.82,67.44 52.2,67.83 J13.3 | J15.3 82.67,68.83 82.17,68.33 82.17,59.31 | v79.76,58.17 80.9,59.31 82.17,59.31
  Bottom 0.152: v51.82,67.44 53.09,66.17 53.09,58.17 56.9,54.36 v74.26,54.36 75.53,55.63 78.49,55.63 79.76,56.9 v79.76,58.17
SDA_LV
  Top 0.152: U2.9 29.08,16.39 30.99,14.48 R2.1
SDA_LV1
  Top 0.152: U1.9 70.23,16.39 72.14,14.48 R15.1
SDA_LV2
  Top 0.152: U3.9 29.08,57.54 30.99,55.63 R23.1
SDA_LV3
  Top 0.152: U4.9 70.23,57.54 72.14,55.63 R31.1
TXLV
  Top 0.152: U2.13 39.12,27.18 41.66,29.72 41.66,37.72 38.86,40.51 37.81,41.57 R3.1
TXLV1
  Top 0.152: U1.13 80.26,27.18 82.8,29.72 82.8,37.72 80.01,40.51 78.95,41.57 R1.1
TXLV2
  Top 0.152: U3.13 39.12,68.33 41.66,70.87 41.66,78.87 38.86,81.66 37.81,82.72 R17.1
TXLV3
  Top 0.152: U4.13 80.26,68.33 82.8,70.87 82.8,78.87 80.01,81.66 78.95,82.72 R25.1
TXO
  Top 0.152: JP11.5 32.26,44.96 34.29,44.96 35.05,44.2 R3.2
TXO1
  Top 0.152: JP22.5 73.41,44.96 75.44,44.96 76.2,44.2 R1.2
TXO2
  Top 0.152: JP33.5 32.26,86.11 34.29,86.11 35.05,85.34 R17.2
TXO3
  Top 0.152: JP44.5 73.41,86.11 75.44,86.11 76.2,85.34 R25.2

## Text on the board
Bottom: x02 | x02 | x02 | x02
Milling: v-score | v-score | v-score | v-score | v-score | v-score